# EAGLE board version1b-dump2 (EAGLE 6.5.0)

Size 160 x 100 mm. Coordinates in mm from the lower left corner, seen from the top.
Outline: 0,0 160,0 160,100 0,100 0,0
Copper layers (1*16): Top 0.035mm / dielectric 1.5mm / Bottom 0.035mm
Design rules "default": minimum track width 10mil, minimum drill 24mil, track to track 8mil, track to pad 8mil, pad to pad 8mil, via to via 8mil, smd to smd 8mil, copper to edge 40mil, drill to drill 8mil, minimum pad ring 10mil, minimum via ring 8mil, stop-mask expansion 4mil, vias tented up to drill 0mil, thermal gap 10mil

## Footprints (pad centres in the part's own frame; a part is rotated, then mirrored left to right if it is on the bottom)
153CLV-0605 = smd 3.5 x 1.6: + 2.7,0; - -2.7,0
SMA = smd 2 x 2: P$1 -1.94,0; P$2 1.94,0
MULTIWATT-15 = drill 1.2 long: 1 -8.89,-7.62; 2 -7.62,-2.54; 3 -6.35,-7.62; 4 -5.08,-2.54; 5 -3.81,-7.62; 6 -2.54,-2.54; 7 -1.27,-7.62; 8 0,-2.54; 9 1.27,-7.62; 10 2.54,-2.54; 11 3.81,-7.62; 12 5.08,-2.54; 13 6.35,-7.62; 14 7.62,-2.54; 15 8.89,-7.62
1X01 = drill 1.016 pad 1.88: 1 0,0
1X03 = drill 1.016 pad 1.88: 1 0,0; 2 2.54,0; 3 5.08,0
ARDUINO-NOHOLE = drill 1 pad 1.676 octagon: 3V 35.56,2.54; 5V 38.1,2.54; A0 50.8,2.54; A1 53.34,2.54; A2 55.88,2.54; A3 58.42,2.54; A4 60.96,2.54; A5 63.5,2.54; AREF 23.876,50.8; D0 63.5,50.8; D1 60.96,50.8; D2 58.42,50.8; D3 55.88,50.8; D4 53.34,50.8; D5 50.8,50.8; D6 48.26,50.8; D7 45.72,50.8; D8 41.656,50.8; D9 39.116,50.8; D10 36.576,50.8; D11 34.036,50.8; D12 31.496,50.8; D13 28.956,50.8; GND 26.416,50.8; GND1 43.18,2.54; GND2 40.64,2.54; RESET 33.02,2.54; VIN 45.72,2.54
W237-4 = drill 1.194 long: 1 -7.5,-1.27; 2 -2.5,-1.27; 3 2.5,-1.27; 4 7.5,-1.27

## Placement (x,y rotation side)
C7  100uF  [153CLV-0605]  -59.69,60.96 0 top  (outside the outline)
D1  SS14  [SMA]  -67.31,59.69 0 top  (outside the outline)
D2  SS14  [SMA]  -74.93,59.69 0 top  (outside the outline)
D3  SS14  [SMA]  -82.55,59.69 0 top  (outside the outline)
D4  SS14  [SMA]  -90.17,59.69 0 top  (outside the outline)
D5  SS14  [SMA]  -16.51,74.93 0 top  (outside the outline)
D6  SS14  [SMA]  -24.13,74.93 0 top  (outside the outline)
D7  SS14  [SMA]  -31.75,74.93 0 top  (outside the outline)
D9  SS14  [SMA]  -39.37,74.93 0 top  (outside the outline)
IC4  L298  [MULTIWATT-15]  -24.13,68.58 0 top  (outside the outline)
JP1  M01PTH  [1X01]  -50.8,74.93 0 top  (outside the outline)
JP2  M01PTH  [1X01]  -59.69,74.93 0 top  (outside the outline)
JP3  M01PTH  [1X01]  -68.58,74.93 0 top  (outside the outline)
JP4  M01PTH  [1X01]  -77.47,74.93 0 top  (outside the outline)
JP5  M01PTH  [1X01]  -86.36,74.93 0 top  (outside the outline)
JP6  M01PTH  [1X01]  -95.25,74.93 0 top  (outside the outline)
JP7  M01PTH  [1X01]  -19.05,82.55 0 top  (outside the outline)
JP8  M01PTH  [1X01]  -27.94,82.55 0 top  (outside the outline)
JP9  M01PTH  [1X01]  -36.83,82.55 0 top  (outside the outline)
JP10  M01PTH  [1X01]  -45.72,82.55 0 top  (outside the outline)
JP11  M01PTH  [1X01]  -54.61,82.55 0 top  (outside the outline)
JP12  M01PTH  [1X01]  -63.5,82.55 0 top  (outside the outline)
JP13  M01PTH  [1X01]  -72.39,82.55 0 top  (outside the outline)
JP14  M01PTH  [1X01]  -81.28,82.55 0 top  (outside the outline)
JP15  M01PTH  [1X01]  -90.17,82.55 0 top  (outside the outline)
JP16  M01PTH  [1X01]  -19.05,90.17 0 top  (outside the outline)
JP17  M01PTH  [1X01]  -27.94,90.17 0 top  (outside the outline)
JP18  M01PTH  [1X01]  -36.83,90.17 0 top  (outside the outline)
JP19  M01PTH  [1X01]  -45.72,90.17 0 top  (outside the outline)
JP20  M01PTH  [1X01]  -54.61,90.17 0 top  (outside the outline)
JP21  M01PTH  [1X01]  -63.5,90.17 0 top  (outside the outline)
JP22  M01PTH  [1X01]  -72.39,90.17 0 top  (outside the outline)
JP23  [1X03]  -81.28,87.63 0 top  (outside the outline)
JP24  [1X03]  -90.17,87.63 0 top  (outside the outline)
JP25  [1X03]  -20.32,95.25 0 top  (outside the outline)
JP26  [1X03]  -29.21,95.25 0 top  (outside the outline)
JP27  [1X03]  -38.1,95.25 0 top  (outside the outline)
JP28  [1X03]  -46.99,95.25 0 top  (outside the outline)
JP29  [1X03]  -55.88,95.25 0 top  (outside the outline)
JP30  [1X03]  -64.77,95.25 0 top  (outside the outline)
JP31  [1X03]  -73.66,95.25 0 top  (outside the outline)
JP32  [1X03]  -82.55,95.25 0 top  (outside the outline)
JP33  [1X03]  -91.44,95.25 0 top  (outside the outline)
JP34  [1X03]  -20.32,100.33 0 top  (outside the outline)
U$1  ARDUINO-NOHOLE  [ARDUINO-NOHOLE]  -81.28,1.27 0 top  (outside the outline)
X1  [W237-4]  -44.45,63.5 0 top  (outside the outline)

## Library data of the parts
C7 U$1 = adafruit
D1-D7 D9 = SmartPrj
IC4 = st-microelectronics; MPN: L298N; OC_FARNELL: 1589425; OC_NEWARK: 32M1527
JP1-JP34 = SparkFun
X1 = con-wago-500; OC_FARNELL: unknown; OC_NEWARK: unknown

## Nets
N$1: JP1.1 U$1.D0
N$2: JP2.1 U$1.D1
N$3: JP28.3 U$1.A5
N$4: JP3.1 U$1.D2
N$5: JP4.1 U$1.D4
N$6: JP29.3 U$1.A4
N$7: JP5.1 U$1.D7
N$8: JP6.1 U$1.D8
N$9: JP30.3 U$1.A3
N$10: JP7.1 U$1.D12
N$11: JP8.1 U$1.D13
N$12: JP31.3 U$1.A2
N$13: JP9.1 U$1.GND
N$14: JP23.1 U$1.D3
N$15: JP24.1 U$1.D5
N$16: JP33.3 U$1.A0
N$17: JP32.3 U$1.A1
N$18: JP10.1 U$1.AREF
N$19: JP14.1 U$1.RESET
N$20: JP25.1 U$1.D6
N$21: JP15.1 U$1.3V
N$22: JP16.1 U$1.GND1
N$23: JP27.1 U$1.D10
N$24: D7.P$1 D9.P$2 IC4.2 X1.4
N$25: D1.P$2 D6.P$1 IC4.3 X1.3
N$26: JP34.1 U$1.D11
N$27: D2.P$2 D5.P$1 IC4.13 X1.2
N$28: D3.P$2 D4.P$1 IC4.14 X1.1
N$29: IC4.6 JP22.1
N$30: JP26.1 U$1.D9
N$31: IC4.11 JP21.1
N$32: IC4.12 JP17.1
N$33: IC4.10 JP18.1
N$34: IC4.7 JP19.1
N$35: IC4.5 JP20.1
VDD: IC4.9 JP13.1 JP23.2 JP24.2 JP25.2 JP26.2 JP27.2 JP28.1 JP29.1 JP30.1 JP31.1 JP32.1 JP33.1 JP34.2 U$1.5V
VPP: C7.+ D1.P$1 D2.P$1 D3.P$1 D9.P$1 IC4.4 JP11.1 U$1.VIN
VSS: C7.- D4.P$2 D5.P$2 D6.P$2 D7.P$2 IC4.1 IC4.8 IC4.15 JP12.1 JP23.3 JP24.3 JP25.3 JP26.3 JP27.3 JP28.2 JP29.2 JP30.2 JP31.2 JP32.2 JP33.2 JP34.3 U$1.GND2

## Tracks (layer width: path | path; a pad name or v marks a point on that pad's centre or on a via)
N$1  (1 unrouted)
N$2  (1 unrouted)
N$3  (1 unrouted)
N$4  (1 unrouted)
N$5  (1 unrouted)
N$6  (1 unrouted)
N$7  (1 unrouted)
N$8  (1 unrouted)
N$9  (1 unrouted)
N$10  (1 unrouted)
N$11  (1 unrouted)
N$12  (1 unrouted)
N$13  (1 unrouted)
N$14  (1 unrouted)
N$15  (1 unrouted)
N$16  (1 unrouted)
N$17  (1 unrouted)
N$18  (1 unrouted)
N$19  (1 unrouted)
N$20  (1 unrouted)
N$21  (1 unrouted)
N$22  (1 unrouted)
N$23  (1 unrouted)
N$24  (3 unrouted)
N$25  (3 unrouted)
N$26  (1 unrouted)
N$27  (3 unrouted)
N$28  (3 unrouted)
N$29  (1 unrouted)
N$30  (1 unrouted)
N$31  (1 unrouted)
N$32  (1 unrouted)
N$33  (1 unrouted)
N$34  (1 unrouted)
N$35  (1 unrouted)
VDD  (14 unrouted)
VPP  (7 unrouted)
VSS  (21 unrouted)